# Altium PCB PCB1.PcbDoc (part 2 of 2)
Units mil, origin at the board's own origin, x right, y up, seen from the top; angles counter-clockwise.
Board outline 2835 x 2165.35 mil, 4 copper layers (Top01, GND02, PWR03, Bottom04), stack 23.756 mil thick; 53 components, 129 nets, 681 pads, 268 vias.
Unrouted connection lines stored in the file: 1.
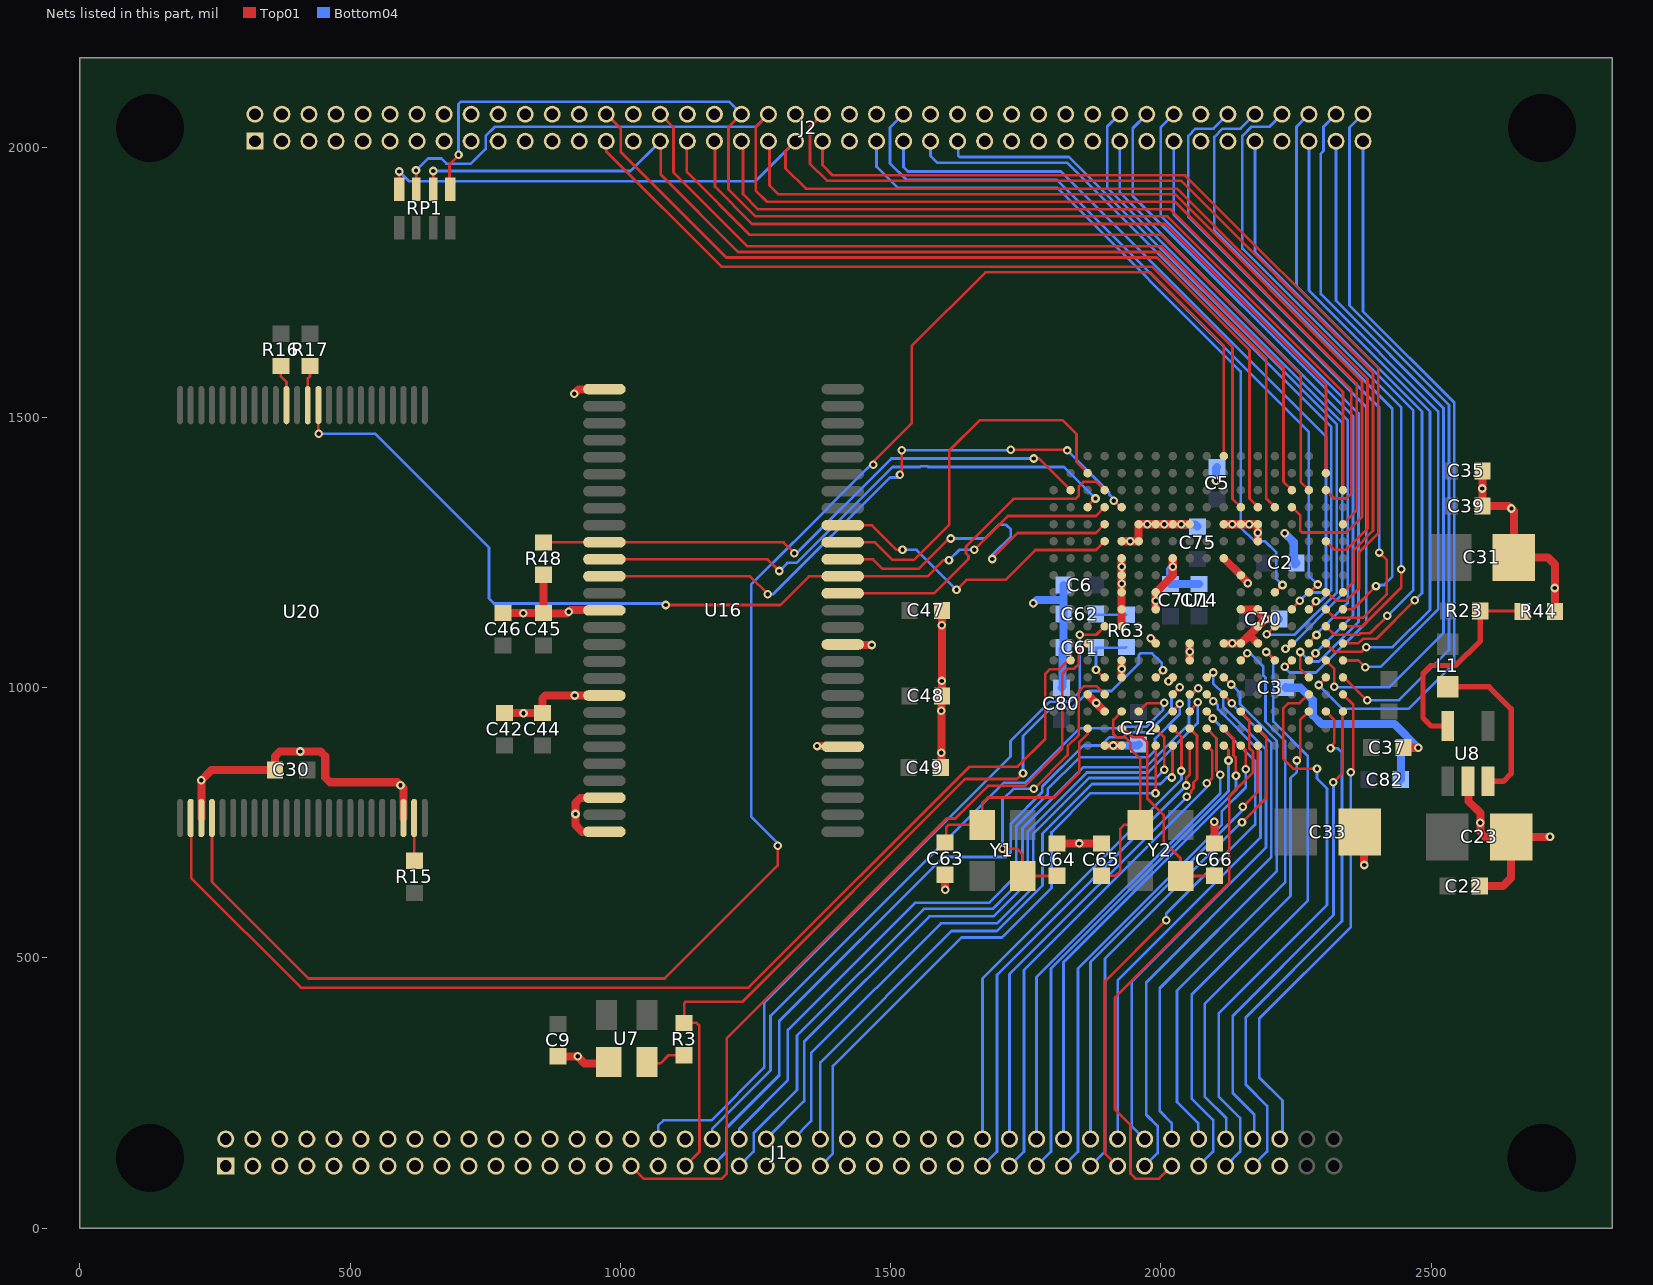
[diagram p4: the nets of this part, all layers, seen from the top]

## Via types
v1: diameter 16, hole 8, Top01 to Bottom04, tented both sides, 268 vias

## Nets (pads, with @x,y where several pads share a name; then routed paths per layer and width w, separated by ;. In a path a pad name is that pad's centre, name@x,y a point inside that pad or via, vN(x,y) a via of type N, cw(c..) or ccw(c..) an arc to the next point about the centre after c; other vN are vias at no path point) (continued)
GND: C2.2 C3.2 C5.2 C6.2 C7.2 C9.2 C22.2 C23.2 C30.2 C31.2 C33.2 C35.2 C37.2 C39.2 C42.2 C44.2 C45.2 C46.2 C47.2 C48.2 C49.2 C61.2 C62.2 C63.2 C64.2 C65.2 C66.2 C70.2 C72.2 C74.2 C75.2 C80.2 C82.2 J1.1 J1.2 J1.3 J1.4 J1.5 J1.6 J1.7 J1.8 J1.9 J1.10 J1.11 J1.12 J1.13 J1.14 J1.15 J1.16 J1.17 J1.18 J1.19 J1.20 J1.21 J1.22 J1.23 J1.24 J1.25 J1.26 J1.27 J1.28 J1.29 J1.30 J1.32 J1.33 J1.36 J1.41 J1.43 J1.47 J1.48 J1.49 J1.50 J1.51 J1.52 J1.53 J1.54 J1.55 J1.56 J1.79 J2.1 J2.2 J2.3 J2.4 J2.5 J2.6 J2.7 J2.8 J2.9 J2.10 J2.11 J2.12 J2.13 J2.14 J2.15 J2.16 J2.17 J2.18 J2.19 J2.20 J2.21 J2.22 J2.23 J2.24 J2.25 J2.26 J2.29 J2.30 J2.34 J2.36 J2.42 J2.45 J2.46 J2.48 J2.52 J2.54 J2.55 J2.56 J2.57 J2.58 J2.59 J2.60 J2.61 J2.62 J2.63 J2.64 J2.67 J2.71 J2.72 J2.73 J2.77 R44.1 R48.2 U1.F5 U1.F6 U1.F10 U1.F11 U1.F12 U1.G5 U1.G8 U1.G10 U1.G12 U1.H5 U1.H7 U1.H12 U1.K5 U1.K12 U1.K13 U1.L5 U1.L7 U1.L14 U1.M5 U1.M9 U1.M10 U1.M12 U1.N5 U1.N6 U1.P6 U1.P7 U1.P8 U1.P9 U1.P10 U1.P11 U1.P13 U1.P14 U1.P18 U1.R16 U1.R18 U1.T15 U7.1 U8.2 U16.6 U16.12 U16.28 U16.41 U16.46 U16.52 U16.54 U20.27 U20.46 | length 4617
  Top01 w15: U20.27@224.83,759 v1(224.83,828.83) 244,848 C30.2@361.08,848 361.08,873.08 370,882 v1(407.61,882) 445.21,882 454,873.21 454,833.79 462.79,825 588,825 v1(593.43,819.57) 598.85,814.15 U20.46@598.85,759 ; C46.2@783,1137.92 v1(820.26,1137.92) C45.2@857.51,1137.92 C45.2@857.76,1137.68 ; C42.2@786,952.92 v1(821,952.92) C44.2@856,952.92 856,980.48 861.04,985.52 v1(915.78,985.52) U16.46@970.53,985.52 ; R48.2@858,1209.08 857.76,1208.83 C45.2@857.76,1137.68 ; C9.2@885,318.08 v1(920.98,318.08) 934,305.06 U7.1@977.47,305.06 ; v1(915,1544) 922.55,1551.55 969.63,1551.55 U16.28@970.53,1552.45 ; U16.54@970.53,733.55 929.24,733.55 917,745.79 v1(917,766.32) 917,786.86 925.79,795.65 969.63,795.65 U16.52@970.53,796.54 ; U16.41@970.53,1143 969.63,1143.9 907.9,1143.9 v1(904.45,1140.45) 901,1137 858.43,1137 C45.2@857.76,1137.68 ; v1(1364,892) 1364.07,891.93 1410.58,891.93 U16.6@1411.47,891.03 ; U16.12@1410.58,1080.9 U16.12@1411.47,1080.01 1412.37,1079.11 v1(1464.89,1079.11) v1@1465,1079 ; C49.2@1592.92,852 1593.92,853 v1(1593.92,879.56) v1(1593.92,957.44) 1593.92,984 C48.2@1594.92,985 v1(1594.92,1012.56) v1(1594.92,1115.44) C47.2@1594.92,1143 ; v1(1601,626.44) C63.2@1601,654 ; C64.2@1808,711.92 v1(1849,711.92) C65.2@1890,711.92 ; U1.T15@1864.48,987.5 U1.R16@1895.98,956.01 v1(1880.23,971.76) ; U1.R18@1895.98,893.02 v1(1911.72,893.02) U1.P18@1927.47,893.02 ; U1.P14@1927.47,1019 v1(1927.47,1034.75) U1.P13@1927.47,1050.5 ; U1.P11@1927.47,1113.49 U1.P10@1927.47,1144.98 U1.P9@1927.47,1176.48 v1(1927.47,1192.23) U1.P8@1927.47,1207.98 v1(1927.47,1223.72) U1.P7@1927.47,1239.47 ; U1.P6@1927.47,1270.97 v1(1943.22,1270.97) U1.N6@1958.97,1270.97 U1.N5@1958.97,1302.46 v1(1974.72,1302.46) U1.M5@1990.46,1302.46 v1(2006.21,1302.46) U1.L5@2021.96,1302.46 v1(2037.71,1302.46) U1.K5@2053.46,1302.46 ; v1@1981,1092 v1(1981,1091.66) 1990.46,1082.19 U1.M12@1990.46,1081.99 ; U1.M10@1990.46,1144.98 v1(1990.46,1160.73) U1.M9@1990.46,1176.48 2021.96,1207.98 v1(2021.96,1223.72) U1.L7@2021.96,1239.47 ; v1(2014,1012) 2014.76,1012 2021.76,1019 U1.L14@2021.96,1019 ; U1.K13@2053.46,1050.5 v1(2053.46,1066.24) U1.K12@2053.46,1081.99 ; C66.2@2099,711.92 v1(2099,752) ; U1.H12@2116.45,1081.99 v1(2132.2,1081.99) U1.G12@2147.95,1081.99 ; U1.H5@2116.45,1302.46 v1(2132.2,1302.46) U1.G5@2147.95,1302.46 v1(2163.69,1302.46) U1.F5@2179.44,1302.46 v1(2179.44,1286.72) U1.F6@2179.44,1270.97 ; U1.H7@2116.65,1239.47 U1.H7@2116.45,1239.47 U1.G8@2147.95,1207.98 2147.95,1207.77 2160.81,1194.91 2160.81,1193.19 v1(2161,1193) ; U1.G10@2147.95,1144.98 U1.F10@2179.44,1144.98 2179.44,1140.33 v1(2192.96,1126.81) ; U1.G12@2147.99,1081.99 2160,1094 ; U1.F12@2179.44,1081.99 2179.24,1081.99 2167.23,1094 2160,1094 ; U1.F11@2179.44,1113.44 2160,1094 ; U1.F11@2179.44,1113.49 2179.64,1113.49 v1(2192.96,1126.81) ; v1@2195.44,1126.81 v1(2192.96,1126.81) ; C33.2@2368.06,733 2376,725.06 v1(2376,672) ; C37.2@2448.92,889 v1(2476.48,889) ; U8.2@2568,826.82 2569,825.82 2569,790 2591,768 v1(2591,750.39) 2591,732.79 2599.79,724 C23.2@2648.11,724 ; C22.2@2589.92,633 2633,633 2648.11,648.11 C23.2@2648.11,724 ; C35.2@2594.84,1401 v1(2594.84,1368.5) C39.2@2594.84,1336 2644,1336 v1(2648.56,1331.44) 2653.11,1326.89 C31.2@2653.11,1241 2716,1241 2728.92,1228.08 v1(2728.92,1184.54) R44.1@2728.92,1141 ; v1(2720,724) C23.2@2648.11,724
  Bottom04 w15: v1(1764,1156) 1770.44,1162.44 1820.08,1162.44 ; C80.2@1816,999.92 1818.04,1001.96 1818.04,1071.96 C61.2@1820.08,1074 C62.2@1820.08,1136 1820.08,1162.44 ; C6.2@1820.08,1190 1820.08,1162.44 ; v1(1911.72,893.02) 1911.92,893.21 1957.05,893.21 C72.2@1959,895.16 ; v1(2021.96,1223.72) 2021.96,1223.45 2017,1218.49 2017,1192.92 C7.2@2018,1191.92 C74.2@2071,1191.92 ; v1(2037.71,1302.46) 2037.9,1302.27 2063.65,1302.27 C75.2@2068,1297.92 ; v1(2102,1383) 2102,1405.92 C5.2@2104,1407.92 ; v1(2192.96,1126.81) 2218.73,1126.81 C70.2@2218.92,1127 ; v1(2229,1286) 2245.75,1269.25 2245.75,1236.17 C2.2@2250.92,1231 C2.2@2247.92,1228 ; C3.2@2230.92,1000.79 C3.2@2230.92,1000 2258.48,1000 2281,977.48 2281,949 2297,933 2432.1,933 v1@2476.29,888.81 ; C82.2@2443.92,830 2443.92,875.92 2456.81,888.81 v1@2476.29,888.81 ; v1(2476.48,889) v1@2476.29,888.81
GPI_00: J1.73 U1.C16 | length 959.3
  Top01 w5: v1(2251.46,865.46) 2257.81,871.81 2257.81,939.89 U1.C16@2273.93,956.01 U1.C16@2273.93,956.93
  Bottom04 w5: J1.73@2070,115 2096.75,141.75 2096.75,200.25 2057,240 2057,432 2240,615 2240,833 2251.46,844.46 v1(2251.46,865.46)
GPI_02: J2.70 U1.C14 | length 1301.6
  Top01 w5: v1(2258,1066) 2258,1034.93 U1.C14@2273.93,1019 U1.C14@2276,1019
  Bottom04 w5: J2.70@2024,2061 2000,2037 2000,1873 2365.5,1507.5 2365.5,1121.45 2292.42,1048.38 2275.62,1048.38 v1(2258,1066)
GPI_03: J2.28 U1.F4 | length 1694.7
  Top01 w5: J2.28@974,2061 1000.75,2034.25 1000.75,1991.25 1196,1796 1993,1796 2164.07,1624.93 2164.07,1350.19 2179.44,1334.82 U1.F4@2179.44,1333.96 U1.F4@2180.96,1333.96
GPI_04: J1.76 U1.E13 | length 1052.5
  Top01 w5: v1@2195,1067 2210.94,1051.06 U1.E13@2210.94,1050.5 U1.E13@2210.5,1050.5
  Bottom04 w5: J1.76@2120,165 2121,166 2121,204 2081,244 2081,415 2272,606 2272,873.14 2208,937.14 2208,1053 v1(2195,1066)
GPI_05: J1.38 U1.N16 | length 1301.8
  Top01 w5: U1.N16@1958.97,956.97 U1.N16@1958.97,956.01 1974.34,971.38 2005.38,971.38 v1(2006,972)
  Bottom04 w5: J1.38@1170,165 1170,184 1278,292 1278,393 1709.44,824.44 1749.36,824.44 1849.68,924.76 1933.14,924.76 1936,927.62 1972.93,927.62 2003.9,958.58 2003.9,969.9 v1(2006,972)
GPI_07: J2.69 U1.D13 | length 1253.1
  Top01 w5: v1@2227,1040 2228.49,1038.51 v1(2229.09,1038.51) 2229.7,1038.51 2241.68,1050.5 U1.D13@2242.43,1050.5 U1.D13@2242.5,1050.5
  Bottom04 w5: J2.69@2024,2011 2024,1875 2380,1519 2380,1121 2287.08,1028.08 2238.04,1028.08 2229.09,1037.02 v1(2229.09,1038.51)
GPI_08: J1.77 U1.B16 | length 967.8
  Top01 w5: U1.B16@2305.43,956.01 2320.8,940.63 2320.8,897.78 2314,890.98 v1(2314,888)
  Bottom04 w5: J1.77@2170,115 2196.75,141.75 2196.75,226.25 2157,266 2157,390 2335,568 2335,880 2327,888 v1(2314,888)
GPI_16: J1.59 U1.J18 | length 937.6
  Top01 w5: v1(2085,823) 2095.08,833.08 2095.08,882.89 U1.J18@2084.95,893.02 U1.J18@2084.95,893.02
  Bottom04 w5: J1.59@1720,115 1746.75,141.75 1746.75,477.66 2085,815.91 v1(2085,823)
GPI_22: J1.74 U1.G13 | length 1051.9
  Top01 w5: U1.G13@2145.5,1050.5 U1.G13@2147.95,1050.5 2147.95,1051.95 v1(2160,1064)
  Bottom04 w5: J1.74@2070,165 2069,166 2069,195 2031,233 2030,233 2030,440 2230,640 2230,901 2193.54,937.46 2193.54,1018.85 2189.3,1023.09 2189.3,1039.7 2165,1064 v1(2160,1064)
GPIO_00: J2.80 U1.A12 | length 1176.4
  Top01 w5: U1.A12@2336.92,1081.99 2365.07,1081.99 2373.58,1090.5 2398.5,1090.5 v1(2470,1162)
  Bottom04 w5: J2.80@2274,2061 2250.75,2037.75 2250.75,1743.39 2483,1511.14 2483,1175 v1(2470,1162)
GPIO_01: J2.78 U1.A11 | length 1187.1
  Top01 w5: U1.A11@2336.92,1114.92 U1.A11@2336.92,1113.49 2372.63,1113.49 2445,1185.86 v1(2445,1219) v1@2445,1220
  Bottom04 w5: J2.78@2224,2061 2200.75,2037.75 2167.87,2037.75 2150.75,2020.63 2150.75,1812.25 2445,1518 v1(2445,1219)
GPO_00: J2.33 U1.C3 | length 1568.5
  Top01 w5: J2.33@1124,2011 1123,2010 1123,1954 1239,1838 2000,1838 2258.56,1579.44 2258.56,1380.83 U1.C3@2273.93,1365.46
GPO_01: J2.39 U1.D4 | length 1759.4
  Top01 w5: J2.39@1274,2011 1276,2009 1276,1929 1292,1913 2026.14,1913 2372.3,1566.85 2372.3,1316.1 2343.2,1287 2260.93,1287 2258,1289.93 2258,1318.39 U1.D4@2242.43,1333.96 U1.D4@2242.43,1335.43
GPO_02: J2.83 U1.B14 | length 1359.7
  Top01 w5: v1(2292,1005) 2292,1005.29 2305.43,1018.71 U1.B14@2305.43,1019 U1.B14@2306,1019
  Bottom04 w5: v1(2292,1005) 2336,961 2458.28,961 2543,1045.72 2543,1527.14 2374,1696.14 J2.83@2374,2011
GPO_03: J2.66 U1.D12 | length 1247
  Top01 w5: v1(2230.67,1072) 2240.67,1081.99 U1.D12@2242.43,1081.99 U1.D12@2243.99,1081.99
  Bottom04 w5: J2.66@1924,2061 1900.75,2037.75 1900.75,1925.53 2335.5,1490.78 2335.5,1172.15 2235.35,1072 v1(2230.67,1072) v1@2226,1072
GPO_05: J2.37 U1.B3 | length 1625.2
  Top01 w5: J2.37@1224,2011 1227,2008 1227,1913 1255,1885 2018,1885 2352.3,1550.7 2352.3,1359.09 2343.29,1350.08 2320.8,1350.08 U1.B3@2305.43,1365.46 U1.B3@2307.46,1365.46
GPO_06: J1.78 U1.A16 | length 894.8
  Top01 w5: v1(2319,825) 2336,842 2336,955.09 U1.A16@2336.92,956.01 U1.A16@2338.01,956.01
  Bottom04 w5: J1.78@2170,165 2173,168 2173,210 2133,250 2133,393 2319.5,579.5 2319.5,824.5 v1(2319,825)
GPO_07: J1.80 U1.A15 | length 924.8
  Top01 w5: U1.A15@2336.92,989.92 U1.A15@2336.92,987.5 2356,968.43 2356,848 v1(2351.5,843.5)
  Bottom04 w5: J1.80@2220,165 2225,170 2225,236 2182,279 2182,387.94 2351.5,557.44 v1(2351.5,843.5)
GPO_08: J2.68 U1.C13 | length 1223.7
  Top01 w5: U1.C13@2273.93,1051.93 U1.C13@2273.93,1050.5 2274.5,1050.5 v1@2286,1062
  Bottom04 w5: J2.68@1974,2061 1948,2035 1948,1910 2355.5,1502.5 2355.5,1133.5 2286,1064 v1(2286,1063.88)
GPO_09: J2.65 U1.C12 | length 1133.3
  Top01 w5: U1.C12@2273.99,1081.99 U1.C12@2273.93,1081.99 2273.93,1083.46 v1(2288,1097.53)
  Bottom04 w5: J2.65@1924,2011 1924,1916.43 2345.5,1494.93 2345.5,1156.5 2288,1099 v1(2288,1097.53)
GPO_10: J2.53 U1.E11 | length 1420.6
  Top01 w5: v1(2196,1099) 2210.49,1113.49 U1.E11@2210.94,1113.49
  Bottom04 w5: J2.53@1624,2011 1625,2010 1625,1984.93 1627.93,1982 1830.14,1982 2325.5,1486.64 2325.5,1176.3 2247.2,1098 v1@2202,1098
GPO_12: J2.79 U1.B12 | length 1192.2
  Top01 w5: U1.B12@2305.43,1083.43 U1.B12@2305.43,1081.99 2320.8,1066.62 2371.62,1066.62 v1(2380,1075)
  Bottom04 w5: J2.79@2274,2011 2274,1735 2498,1511 2498,1144.08 2428.92,1075 v1(2380,1075)
GPO_13: J2.81 U1.B13 | length 1289.2
  Top01 w5: U1.B13@2307.5,1050.5 U1.B13@2305.43,1050.5 2321,1034.92 v1(2321,1002)
  Bottom04 w5: J2.81@2324,2011 2324,1716 2523,1517 2523,1101.08 2422.92,1001 v1@2324.64,1001
GPO_14: J2.32 U1.D3 | length 1628.3
  Top01 w5: J2.32@1074,2061 1098.5,2036.5 1098.5,1953.5 1235.5,1816.5 2001.5,1816.5 2227,1591 2227,1380.89 U1.D3@2242.43,1365.46
GPO_15: J2.84 U1.A14 | length 1330.8
  Top01 w5: U1.A14@2336.92,1019.92 U1.A14@2336.92,1019 2338.46,1019 2380.46,977 v1(2382,977)
  Bottom04 w5: J2.84@2374,2061 2349,2036 2349,1707 2533,1523 2533,1069.44 2440.56,977 v1(2382,977)
GPO_16: J2.49 U1.D10 | length 1398.8
  Top01 w5: U1.D10@2244.98,1144.98 U1.D10@2242.43,1144.98 2242.43,1146.43 v1(2257,1161)
  Bottom04 w5: J2.49@1524,2011 1524,1963 1532,1955 1815,1955 2305.5,1464.5 2305.5,1184.58 2296.92,1176 2272,1176 v1(2257,1161)
GPO_20: J2.35 U1.B2 | length 1530.2
  Top01 w5: J2.35@1174,2011 1175,2010 1175,1927 1244,1858 2008,1858 2305.43,1560.57 U1.B2@2305.43,1396.95
LDQM0: U1.R3 U16.15 | length 606.7
  Top01 w5: U16.15@1411.47,1174.5 1580.5,1174.5 1644.12,1238.12 1644.12,1243.96 1639.5,1248.58 1639.5,1261.42 1727.41,1349.34 1842,1349.34 1848.36,1355.69 1848.36,1372.36 1856.83,1380.83 1880.6,1380.83 U1.R3@1895.98,1365.46 U1.R3@1895.54,1365.46
LDQM1: U1.P4 U16.39 | length 1153.8
  Top01 w5: U16.39@970.53,1205.99 1240.01,1205.99 v1(1273,1173) ; v1(1517.25,1394.25) 1520.5,1397.5 v1(1520.5,1439.5) ; v1(1722,1440) 1826,1440 v1(1827,1439) ; v1(1913,1346) 1925.04,1333.96 U1.P4@1927.47,1333.96
  Bottom04 w5: v1(1273,1173) 1282.92,1173 1498.92,1389 1512,1389 v1(1517.25,1394.25) ; v1(1520.5,1439.5) 1721.5,1439.5 v1(1722,1440) ; v1(1827,1439) 1904.5,1361.5 1904.5,1357.48 1913,1348.98 v1(1913,1346)
LnSDCAS: U1.R5 U16.17 | length 662.4
  Top01 w5: U16.17@1411.47,1237.49 1467.51,1237.49 1485,1220 1552,1220 1608,1276 v1(1611,1276) ; v1(1688,1238) 1688,1239.34 1735,1286.34 1879.85,1286.34 U1.R5@1895.98,1302.46 U1.R5@1893.54,1302.46
  Bottom04 w5: v1(1611,1276) 1675.08,1276 1700.58,1301.5 1713.42,1301.5 1722.5,1292.42 1722.5,1279.58 1688,1245.08 v1(1688,1238)
LnSDCS0: U1.R6 U16.19 | length 572.2
  Top01 w5: U16.19@1411.47,1300.48 1465.52,1300.48 1511,1255 v1(1522,1255) ; v1(1622,1181) 1640.46,1199.46 1712.46,1199.46 1767.85,1254.85 1879.85,1254.85 U1.R6@1895.98,1270.97 U1.R6@1895.03,1270.97
  Bottom04 w5: v1(1522,1255) 1548,1255 v1(1622,1181)
LnSDRAS: U1.T2 U16.18 | length 725
  Top01 w5: U16.18@1411.47,1268.98 1471.02,1268.98 1503.5,1236.5 1543.5,1236.5 1608.41,1301.41 1608.41,1438.41 1665,1495 1818,1495 1844,1469 1844,1417.43 1853.24,1408.2 U1.T2@1864.48,1396.95 U1.T2@1864.05,1396.95
MISO0: J2.51 U1.C10 | length 1335.7
  Top01 w5: U1.C10@2273.93,1144.98 2273.93,1145.96 2287,1159.03 v1(2287,1160)
  Bottom04 w5: J2.51@1574,2011 1574,1984 1587,1971 1827,1971 2315.5,1482.5 2315.5,1180.44 2295.06,1160 v1(2287,1160)
MISO1: J2.76 U1.A10 | length 1158.5
  Top01 w5: U1.A10@2336.92,1144.98 2354.98,1144.98 v1(2398,1188)
  Bottom04 w5: J2.76@2174,2061 2147.25,2034.25 2114.37,2034.25 2099,2018.88 2099,1846 2428,1517 2428,1205 2413.1,1190.1 2400.1,1190.1 v1(2398,1188)
MOSI0: J2.43 U1.B9 | length 1728.4
  Top01 w5: J2.43@1374,2011 1374,1967 1393,1948 2045,1948 2402.3,1590.7 2402.3,1286.3 2367,1251 2367,1184.82 2343.29,1161.11 2324,1161.11 ; U1.B9@2305.43,1178.43 U1.B9@2305.43,1176.48 2308.21,1176.48 2317.69,1167 2318.14,1167 2324,1161.14
MOSI1: J2.44 U1.A9 | length 1732.2
  Top01 w5: J2.44@1374,2061 1350.75,2037.75 1350.75,1969.25 1382,1938 2037,1938 2392.3,1582.7 2392.3,1290.44 2357,1255.14 2357,1196.56 U1.A9@2336.92,1176.48
nCS0: U1.U13 U20.26 | length 2146.2
  Top01 w5: U20.26@205.15,759 206,758.15 206,648 409,445 1237.49,445 1646.49,854 1735.08,854 1786.11,905.03 1786.11,1025.37 1795.12,1034.37 1812.47,1034.37 1828.6,1050.5 U1.U13@1832.98,1050.5 U1.U13@1832.98,1048.02
nCS1: J1.34 U1.R11 | length 1382
  Top01 w5: v1(1850,1098) 1880.49,1098 U1.R11@1895.98,1113.49
  Bottom04 w5: J1.34@1070,165 1070,190 1079.69,199.69 1168.31,199.69 1266,297.38 1266,416.58 1722,872.58 1722,901.54 1794.6,974.13 1831.53,974.13 1850,992.61 v1(1850,1098)
nCS2: J1.31 U1.T12 | length 1505.2
  Top01 w5: J1.31@1020,115 1043.25,91.75 1187.75,91.75 1196.75,100.75 1196.75,350.91 1603.84,758 1619.57,758 1643.09,781.53 1679.94,818.37 1748.37,818.37 1817.61,887.61 ; 1817.61,888.61 1817.61,1025.37 1827.36,1035.12 1839.35,1035.12 1848.36,1044.13 1848.36,1068.36 1861.99,1081.99 U1.T12@1864.48,1081.99 U1.T12@1864.48,1081.52
NetC61_1: C61.1 R63.1 U1.R14 | length 119.3
  Top01 w5: v1(1880,1033) 1894,1019 U1.R14@1895.98,1019
  Bottom04 w5: v1(1880,1033) 1880,1073.92 C61.1@1879.92,1074 1934.92,1074 R63.1@1936,1075.08
NetC62_1: C62.1 R63.2 | length 56.5
  Bottom04 w5: C62.1@1879.92,1136 1881,1134.92 R63.2@1936,1134.92
NetC63_1: C63.1 U1.T17 Y1.1 | length 428.4
  Top01 w5: C63.1@1601,713.84 1603,715.84 1603,742 1607.24,746.24 Y1.1@1669.6,746.24 1669.6,786.6 1680,797 1803,797 1849.11,843.11 1849.11,899.38 1864.48,914.76 U1.T17@1864.48,924.51
NetC64_1: C64.1 U1.R15 Y1.2 | length 586.2
  Top01 w5: 1712.41,694.57 1707,699.98 v1(1707,702.2) 1733.35,702.2 1744.4,691.15 Y1.2@1744.4,651.76 1807.68,651.76 C64.1@1808,652.08 ; v1(1765,813) 1827.61,875.61 1827.61,892.03 1848.36,912.78 1848.36,993.12 1858.11,1002.88 1880.6,1002.88 U1.R15@1895.98,987.5 U1.R15@1894.5,987.5
  Bottom04 w5: v1(1707,702.2) 1707,793 1727,813 v1(1765,813)
NetC65_1: C65.1 U1.P16 Y2.1 | length 405.1
  Top01 w5: C65.1@1890,652.08 1916.08,652.08 1925,661 1925,739.32 1931.93,746.24 Y2.1@1961.6,746.24 1961.6,868.64 1943.59,886.65 1943.59,898.64 1933.71,908.52 1917.48,908.52 1912.1,913.9 1912.1,940.63 U1.P16@1927.47,956.01 U1.P16@1924.99,956.01
NetC66_1: C66.1 U1.P17 Y2.2 | length 394.3
  Top01 w5: U1.P17@1926.49,924.51 U1.P17@1927.47,924.51 1929.53,922.46 1933.92,922.46 1947.98,908.39 1965.34,908.39 1975.09,898.64 1975.09,794.54 2005.28,764.35 2005.28,715.58 2036.4,684.46 Y2.2@2036.4,651.76 2098.68,651.76 C66.1@2099,652.08
NetL1_1: L1.1 U8.3 | length 302.3
  Top01 w10: L1.1@2531,1001.63 2607.37,1001.63 2648,961 2648,841 2633.82,826.82 U8.3@2605.4,826.82
NetR3_1: R3.1 U7.2 | length 75.9
  Top01 w5: U7.2@1048.34,305.06 1074.06,305.06 1089.08,320.08 R3.1@1118,320.08
NetR15_1: R15.1 U20.47 | length 79.3
  Top01 w5: U20.47@618.54,759 618.54,680.39 R15.1@619,679.92
NetR16_1: R16.1 U20.14 | length 76.6
  Top01 w5: R16.1@372,1595.08 372,1576 377,1571 ; 377.03,1571 382.31,1565.71 U20.14@382.31,1522.78
NetR17_1: R17.1 U20.12 | length 74.1
  Top01 w5: U20.12@421.68,1522.78 421.68,1571.68 426,1576 R17.1@426,1595.08
NetR23_1: R23.1 R44.2 U8.5 | length 398.9
  Top01 w5: R23.1@2590.92,1142 2668.08,1142 R44.2@2669.08,1141
  Top01 w10: U8.5@2530.6,929.18 2499.82,929.18 2485,944 2485,1026.5 2499.5,1041 2545.14,1041 2590.92,1086.78 R23.1@2590.92,1142
nOE: U1.H1 U20.28 | length 3329.6
  Top01 w5: U20.28@244.52,759 244.52,640.48 423,462 1082,462 1291,671 v1(1291,707.53) ; v1(1467.82,1412.5) 1467.82,1417.82 1539,1489 1539,1632.14 1675.36,1768.5 1980.36,1768.5 2116.45,1632.41 2116.45,1430.51 U1.H1@2116.45,1428.45 U1.H1@2114.39,1430.51
  Bottom04 w5: v1(1291,707.53) 1291,713 1242,762 1242,1190.92 1319.94,1268.86 1320,1268.86 1447.14,1396 1463.64,1412.5 v1(1467.82,1412.5)
nRESET: J1.35 R3.2 U1.M14 | length 1685.1
  Top01 w5: J1.35@1120,115 1146,141 1146,247.84 ; 1146.75,141.75 1146,247.84 ; v1(1745,842) 1734,831 1637.64,831 1225.64,419 1120.93,419 1118,416.07 R3.2@1118,379.92 1141.08,379.92 1146,375 1146,247.84 ; U1.M14@1990.46,1019 1991,1019 v1(2004,1032)
  Bottom04 w5: v1(1745,842) 1745,910.39 1797.15,962.54 1835.54,962.54 1867,994 1908.64,994 1959.25,1044.6 1959.25,1060.57 1962.18,1063.5 1983.64,1063.5 2001.9,1045.24 2001.9,1034.1 v1(2004,1032)
nSYSRESET: J2.27 U1.G4 | length 1632.2
  Top01 w5: J2.27@974,2011 974,1992 1187,1779 1984,1779 2132.57,1630.43 2132.57,1349.34 U1.G4@2147.95,1333.96 U1.G4@2147.95,1335.95
nTRST: J1.64 U1.H17 | length 901
  Top01 w5: U1.H17@2116.51,924.51 U1.H17@2116.45,924.51 2134.57,906.39 2134.57,874.98 2138.5,871.05 2138.5,837.5 v1(2139,837)
  Bottom04 w5: J1.64@1820,165 1820,492.09 2139,811.09 v1(2139,837)
nWE: U1.R4 U16.16 U20.11 | length 1768.9
  Top01 w5: U20.11@441.37,1522.78 441.37,1470.63 v1(442,1470) ; v1(1084,1153) 1296.02,1153 1349.01,1205.99 U16.16@1411.47,1205.99 1567.99,1205.99 1598,1236 v1(1608,1236) ; v1(1655,1255) 1655,1255.92 1716.92,1317.84 1879.85,1317.84 U1.R4@1895.98,1333.96
  Bottom04 w5: v1(442,1470) 546,1470 757,1259 757,1165 766.05,1155.95 1078.08,1155.95 1081.02,1153 v1(1084,1153) ; v1(1608,1236) 1627,1255 v1(1655,1255)
P0.2: J1.44 U1.M17 | length 1183.3
  Top01 w5: U1.M17@1990.46,924.51 2006,908.98 v1(2006,848)
  Bottom04 w5: J1.44@1320,165 1353,198 1353,324 1593,564 1696.49,564 1764.07,631.58 1764.07,729.93 1867.14,833 1991,833 v1(2006,848)
P0.3: J1.45 U1.M18 | length 1149.6
  Top01 w5: v1(1990,805) 1990.46,805.46 U1.M18@1990.46,893.02 U1.M18@1990.46,893.46
  Bottom04 w5: J1.45@1370,115 1393.25,138.25 1393.25,300.25 1631,538 1706,538 1797.57,629.57 1797.57,732.43 1870.14,805 v1(1990,805)
P0.4: J1.37 U1.L15 | length 1387.1
  Top01 w5: U1.L15@2021.96,987.5 2021.96,987.96 v1(2035,1001)
  Bottom04 w5: J1.37@1170,115 1196,141 1196,185 1294,283 1294,383 1597.7,686.7 1713.42,686.7 1722.5,695.78 1722.5,748.58 1780.5,806.58 1780.5,816.78 1856.98,893.26 1890.05,893.26 1905.3,908.52 1931.04,908.52 1940.15,917.62 1977.08,917.62 2019.5,960.04 2019.5,985.5 v1(2035,1001)
P0.5: J1.40 U1.L16 | length 1317.8
  Top01 w5: U1.L16@2023.01,956.01 U1.L16@2021.96,956.01 2021.96,956.96 v1(2035,970)
  Bottom04 w5: J1.40@1220,165 1220,184 1310,274 1310,367 1545,602 1681.92,602 1732.5,652.58 1732.5,744.44 1790.5,802.44 1790.5,812.64 1849.11,871.25 1976.4,871.25 1989,883.84 1989,905.52 2035,951.52 v1(2035,970)
P0.6: J1.46 U1.L18 | length 1128.1
  Top01 w5: v1(2020,834) 2021.5,835.5 2021.5,892.55 U1.L18@2021.96,893.02 U1.L18@2021.96,894.96
  Bottom04 w5: J1.46@1370,165 1370,307 1613,550 1696.64,550 1781,634.36 1781,730 1873,822 1999,822 2011,834 v1(2020,834)
P0.7: J1.58 U1.L17 | length 919
  Top01 w5: U1.L17@2021.96,924.96 U1.L17@2021.96,924.51 2038,908.47 v1(2038,846)
  Bottom04 w5: J1.58@1670,165 1670,462.08 2038,830.08 v1(2038,846)
RTCK: J1.61 U1.H18 | length 930
  Top01 w5: U1.H18@2116.45,894.45 U1.H18@2116.45,893.02 2125,884.46 v1(2125,865.46)
  Bottom04 w5: J1.61@1770,115 1796.75,141.75 1796.75,480.16 2125,808.41 v1(2125,865.46)
SCK0: J2.50 U1.C9 | length 1393.4
  Top01 w5: U1.C9@2273.93,1176.93 U1.C9@2273.93,1176.48 2275.48,1176.48 v1(2290,1191)
  Bottom04 w5: J2.50@1524,2061 1499,2036 1499,1970 1529,1940 1807.06,1940 2273.38,1473.68 2273.38,1207.62 v1(2290,1191)
SCK1: J2.74 U1.B10 | length 1229.5
  Top01 w5: U1.B10@2305.43,1147.89 U1.B10@2305.43,1144.98 2320.8,1129.61 2374.61,1129.61 2418,1173 2418,1236 v1(2404,1250)
  Bottom04 w5: J2.74@2124,2061 2097.25,2034.25 2064.37,2034.25 2050.75,2020.63 2050.75,1871.25 2404,1518 v1(2404,1250)
SCL1: J2.40 RP1.3 U1.A5 | length 2436
  Top01 w5: v1(622,1957) 622.5,1956.5 RP1.3@622.5,1922 ; J2.40@1274,2061 1250.75,2037.75 1250.75,1919.25 1271,1899 2026,1899 2362.3,1562.7 2362.3,1327.84 U1.A5@2336.92,1302.46 U1.A5@2336.92,1304.92
  Bottom04 w5: v1(622,1957) 644,1979 668.93,1979 678.43,1969.5 723.5,1969.5 750.75,1996.75 750.75,2020.63 767.87,2037.75 1250.75,2037.75 J2.40@1274,2061
SCL2: J2.38 RP1.1 U1.A3 | length 2323.4
  Top01 w5: RP1.1@685.5,1922 684,1923.5 684,1968 700.75,1984.75 v1(700.75,1986) ; J2.38@1224,2061 1200,2037 1200,1922 1250,1872 2012,1872 2336.92,1547.08 U1.A3@2336.92,1365.46 U1.A3@2337.46,1365.46
  Bottom04 w5: v1(700.75,1986) 700.75,2079.75 705.25,2084.25 1200.75,2084.25 J2.38@1224,2061
SDA1: J2.41 RP1.4 U1.B6 | length 2476.3
  Top01 w5: RP1.4@591.01,1922 v1(591,1955) ; J2.41@1324,2011 1305.75,1992.75 1305.75,1960.6 1343.11,1923.25 2030.04,1923.25 2382.3,1570.99 2382.3,1294.6 2342.7,1255 2321.39,1255 U1.B6@2305.43,1270.97
  Bottom04 w5: v1(591,1955) 609,1937 1250,1937 J2.41@1324,2011
SDA2: J2.31 RP1.2 U1.E4 | length 2081.2
  Top01 w5: RP1.2@654,1922 v1(654,1956) ; J2.31@1074,2011 1075,2010 1075,1949 1218,1806 1997.14,1806 2195,1608.14 2195,1349.9 U1.E4@2210.94,1333.96
  Bottom04 w5: v1(654,1956) 1019,1956 J2.31@1074,2011
SDR_CKE0: R48.1 U1.U3 U16.37 | length 1082.6
  Top01 w5: R48.1@858,1268.92 858.06,1268.98 U16.37@970.53,1268.98 1302.02,1268.98 v1(1322,1249) ; v1(1765,1424) 1774.44,1424 1831.71,1366.74 U1.U3@1832.98,1365.46 U1.U3@1832.98,1368.02
  Bottom04 w5: v1(1322,1249) 1326.38,1249 1501.38,1424 v1(1765,1424)
SDR_CLK: U1.T4 U16.38 | length 1046.7
  Top01 w5: U16.38@970.53,1237.49 1272.51,1237.49 v1(1294,1216) ; U1.T4@1866.54,1336.02 U1.T4@1864.48,1333.96 1864.48,1336.48 v1@1878,1350
  Bottom04 w5: v1(1294,1216) 1309,1231 1325.92,1231 1503.42,1408.5 1554.58,1408.5 1555.58,1409.5 1568.42,1409.5 1569.42,1408.5 1820.5,1408.5 v1(1879,1350)
SERVICES_N: J1.75 U1.C15 | length 1075.5
  Top01 w5: U1.C15@2274.5,987.5 U1.C15@2273.93,987.5 2272.98,987.5 2256.86,971.38 2236.07,971.38 2226.31,961.63 2226.31,868.68 2245.04,849.96 v1(2288.97,849.97)
  Bottom04 w5: J1.75@2120,115 2146.75,141.75 2146.75,204.25 2107,244 2107,397.5 2307.5,598 2307.5,813.5 2288.97,832.03 v1(2288.97,849.97)
SSEL0: J2.47 U1.E9 | length 1335.7
  Top01 w5: U1.E9@2210.94,1176.48 2211.48,1176.48 v1(2225,1190)
  Bottom04 w5: J2.47@1474,2011 1474,1964 1513,1925 1807.92,1925 2147.7,1585.22 2147.7,1296.54 2173.02,1271.22 2192.18,1271.22 2213.54,1249.85 2213.54,1201.46 v1(2225,1190)
SSEL1: J2.75 U1.B11 | length 1153.7
  Top01 w5: U1.B11@2305.49,1113.49 U1.B11@2305.43,1113.49 2320.8,1098.11 2367.05,1098.11 2369.44,1100.5 2386.5,1100.5 v1(2419,1133)
  Bottom04 w5: J2.75@2174,2011 2174,1806 2467,1513 2467,1181 v1(2419,1133)
TCK: J1.72 U1.H14 | length 991
  Top01 w5: U1.H14@2116.45,1019.55 U1.H14@2116.45,1019 2117,1019 v1(2130,1006)
  Bottom04 w5: J1.72@2020,165 2020,195 1998,217 1998,444 2214.5,660.5 2214.5,901.64 2146.5,969.64 2146.5,990.5 v1@2133,1004
TDI: J1.67 U1.J16 | length 1002.8
  Top01 w5: J1.67@1920,115 1896.75,138.25 1896.75,456.75 v1(2010,570) ; U1.J16@2084.95,956.01 2084.95,955.09 2096,944.04 v1(2096,943.12)
  Bottom04 w5: v1(2010,570) 2010,582.49 2174.5,746.99 2174.5,864.5 2096,943 v1(2096,943.12)
TDO: J1.68 U1.J15 | length 974.3
  Top01 w5: U1.J15@2084.95,987.5 2084.95,987.05 v1(2097,975)
  Bottom04 w5: J1.68@1920,165 1920,458.08 2184.5,722.58 2184.5,881.44 2105.5,960.44 2105.5,967.5 v1@2097,976
TMS: J1.63 U1.G18 | length 923.4
  Top01 w5: U1.G18@2150.02,893.02 U1.G18@2147.95,893.02 2157,883.96 v1(2157,849)
  Bottom04 w5: J1.63@1820,115 1846.75,141.75 1846.75,480.66 2112.5,746.41 2112.5,771.12 2157,815.62 v1(2157,849)
U1_RX: J1.39 U1.K15 | length 1398.2
  Top01 w5: U1.K15@2053.46,987.5 2055.48,987.5 2066.98,999 v1(2069,999)
  Bottom04 w5: J1.39@1220,115 1246.75,141.75 1246.75,175.75 1327,256 1327,356.5 1561.5,591 1689,591 1716.33,618.33 1744,646 1744,740 1857,853 1972.3,853 2052,932.7 2052,982 v1(2069,999)
U1_TX: J1.42 U1.K16 | length 1297.4
  Top01 w5: U1.K16@2053.46,956.01 2053.46,957.23 2068,971.78 v1(2068,973)
  Bottom04 w5: J1.42@1270,165 1340,235 1340,345 1572,577 1690.49,577 1754,640.51 1754,734 1863,843 1976.44,843 2068,934.56 v1(2068,973)
U2_RX: J1.57 U1.K18 | length 938.4
  Top01 w5: v1(2047,819) 2047,833 2053.46,839.46 U1.K18@2053.46,893.02 U1.K18@2055.02,893.02
  Bottom04 w5: J1.57@1670,115 1696.75,141.75 1696.75,468.75 v1(2047,819)
U2_TX: J1.60 U1.K17 | length 910.7
  Top01 w5: v1(2048,798) 2056,806 2056,808.91 2060.5,813.41 2060.5,824.59 2066.83,830.92 2066.83,911.14 U1.K17@2053.46,924.51 U1.K17@2053.46,926.46
  Bottom04 w5: J1.60@1720,165 1720,470 v1(2048,798)
U3_RX: J1.70 U1.J14 | length 1018.1
  Bottom04 w5: J1.70@1970,165 1946,189 1946,456 2194.5,704.5 2194.5,885.58 2115.5,964.58 2115.5,989.43 2096.86,1008.06 2096.86,1023.79 2098.97,1025.9 v1(2096.86,1028)
U3_TX: J1.62 U1.J17 | length 912.3
  Top01 w5: U1.J17@2086.51,924.51 U1.J17@2084.95,924.51 2103.08,906.39 2103.08,845.92 v1(2110,839)
  Bottom04 w5: J1.62@1770,165 1770,464.72 2110,804.72 v1(2110,839)
U4_TX: J2.82 U1.A13 | length 1243.1
  Top01 w5: U1.A13@2336.92,1050.5 2365.5,1050.5 v1(2378,1038)
  Bottom04 w5: J2.82@2324,2061 2300.75,2037.75 2300.75,1992.75 2296,1988 2296,1728 2513,1511 2513,1144.94 2407.03,1038.97 2378.97,1038.97 v1(2378,1038)
U5_RX: J1.66 U1.F18 | length 856.8
  Top01 w5: v1(2151.5,779.5) 2179,807 2179,892.57 U1.F18@2179.44,893.02 U1.F18@2180.02,893.02
  Bottom04 w5: J1.66@1870,165 1870,492.59 2151.5,774.09 v1(2151.5,779.5)
U5_TX: J1.69 U1.H15 | length 1025.5
  Top01 w5: U1.H15@2116.45,989.45 U1.H15@2116.45,987.5 2116.45,986.53 2131,971.98 v1(2131,971)
  Bottom04 w5: J1.69@1970,115 1994,139 1994,189 1973,210 1973,455 2204.5,686.5 2204.5,897.5 v1(2131,971)
U6_RX: J1.65 U1.F17 | length 952.9
  Top01 w5: v1(2150,751) 2195,796 2195,908.95 U1.F17@2179.44,924.51 U1.F17@2181.51,924.51
  Bottom04 w5: J1.65@1870,115 1896.75,141.75 1896.75,498.75 v1@2149.5,751.5
U6_TX: J1.71 U1.G16 | length 1071.7
  Top01 w5: J1.71@2020,115 1996.75,91.75 1953.25,91.75 1944,101 1944,191 1915,220 1915,426.76 2126.56,638.32 2126.56,799.47 2170.5,843.41 2170.5,881.77 2163.32,888.96 2163.32,940.63 U1.G16@2147.95,956.01 U1.G16@2148.01,956.01
pads on no net: U1.A4 U1.A6 U1.A7 U1.A8 U1.B4 U1.B5 U1.B7 U1.B8 U1.B15 U1.B17 U1.C1 U1.C2 U1.C4 U1.C5 U1.C6 U1.C7 U1.C8 U1.C11 U1.C17 U1.C18 U1.D1 U1.D2 U1.D5 U1.D6 U1.D7 U1.D8 U1.D9 U1.D11 U1.D14 U1.D15 U1.D16 U1.D17 U1.D18 U1.E1 U1.E2 U1.E3 U1.E5 U1.E6 U1.E7 U1.E8 U1.E10 U1.E12 U1.E14 U1.E15 U1.E16 U1.E17 U1.E18 U1.F1 U1.F2 U1.F3 U1.F14 U1.F15 U1.F16 U1.G1 U1.G2 U1.G3 U1.G14 U1.G15 U1.G17 U1.H2 U1.H3 U1.H4 U1.H16 U1.J1 U1.J2 U1.J3 U1.J4 U1.L2 U1.M15 U1.M16 U1.N17 U1.N18 U1.P5 U1.P12 U1.R9 U1.R10 U1.R12 U1.R13 U1.T1 U1.T3 U1.T9 U1.T10 U1.T11 U1.T13 U1.T14 U1.U2 U1.U9 U1.U10 U1.U11 U1.U12 U1.U14 U1.U15 U1.U16 U1.U17 U1.V8 U1.V9 U1.V10 U1.V11 U1.V12 U1.V13 U1.V14 U1.V15 U1.V16 U7.3 U16.40 U20.10 U20.13 U20.15 Y1.3 Y1.4 Y2.3 Y2.4

## Polygon pours and split planes (outlines as drawn)
no net on Top01 (solid, pour order 12): 0,2165.35
3V3 on Top01 "Top01-3V3" (solid, pour order 10): 572,1865 706,1865 706,1796 708,1794 572,1794
3V3 on Top01 "Top01-3V3 1" (solid, pour order 0): 2507,861 2453,807 2453,669 2515,607 2519,611 2551,611 2551,661 2546,666 2554,674 2574,674 2574,762 2553,783 2542,783 2537,788 2537,861 2508,861 2507,860
GND on GND02 (split plane): 2814.9,20.1 20.1,20.1 20.1,2145.26 2814.9,2145.26
1V2 on PWR03 (split plane): 2623.9,1483.89 2623.9,1095.11 2610.4,1081.61 2610.4,1081.6 2592.89,1064.1 2476.72,1064.1 2477.1,1066 2476.71,1067.95 2475.6,1069.6 2473.95,1070.71 2472,1071.1 2062,1071.1 2060.05,1070.71 2058.4,1069.6 2057.29,1067.95 2056.9,1066 2056.9,1023 2056.9,1018.11 2052.89,1014.1 1974.23,1014.1 1968.66,1019.67 1968.66,1055.29 1968.66,1103.45 2020.23,1155.02 2021.33,1156.67 2021.72,1158.62 2021.72,1179.47 2094.15,1251.9 2142.89,1251.9 2156.9,1237.89 2156.9,1162.32 2157.29,1160.37 2158.4,1158.72 2162.72,1154.4 2164.37,1153.29 2166.32,1152.9 2289,1152.9 2290.95,1153.29 2292.6,1154.4 2516.6,1378.4 2517.71,1380.05 2518.1,1382 2518.1,1435 2518.1,1472.89 2531.11,1485.9 2621.89,1485.9
1V2_PLL on PWR03 (split plane): 1968.51,1005.4 1970.17,1004.29 1972.12,1003.9 1980.48,1003.9 2014.99,969.4 2015.32,969.17 2015.55,968.84 2017.2,967.73 2019.15,967.34 2146.5,967.34 2148.45,967.73 2148.71,967.9 2356.37,967.9 2396.9,927.37 2396.9,905 2396.9,772.11 2319.4,694.6 2307.77,682.98 2202.23,682.98 2191.1,694.11 2191.1,745 2190.71,746.95 2189.6,748.6 2122.6,815.6 2120.95,816.71 2119,817.1 1871.11,817.1 1828.1,860.11 1828.1,995.89 1841.07,1008.86 1959.95,1008.86 1961.91,1009.24 1963.56,1010.35
3V3 on PWR03 (split plane): 2814.9,20.1 20.1,20.1 20.1,2145.26 2814.9,2145.26

## Other copper
PWR03 (plane layer: these items are gaps in the copper):
  lines w10: 1959.95,1013.95 1838.95,1013.95 1823,998 1823,858 1869,812 2119,812 2186,745 2186,692 2200.12,677.88 2309.88,677.88 2323,691 2402,770 2402,905 2402,929.48 2358.48,973 2169,973 2131.93,973 ; 1982.59,1009 2018.59,973 2143.52,973 ; 1984.06,1009 2074,1009 2076,1011 ; 1996,1009 1972.12,1009 1963.56,1017.56 1963.56,1055.29 1963.56,1105.56 2016.62,1158.62 2016.62,1181.58 2092.04,1257 2145,1257 2162,1240 2162,1162.32 2166.32,1158 2289,1158 2513,1382 2513,1435 2513,1475 2529,1491 2624,1491 2629,1486 2629,1093 2614,1078 2595,1059 2465,1059 ; 2019.15,972.44 2146.5,972.44 ; 2054,1008 2062,1016 2062,1023 2062,1066 2472,1066 2461.29,1055.29 ; 2603,1435 2614,1424

## Silkscreen, mask and mechanical layers (free items; w line width, h text height)
Top Overlay:
  text "Mg_D" at 2530,297 h60
Mechanical 1:
  lines w10: -220,60 -200,0 ; -220,2105.35 -200,2165.35 ; -210,0 -190,0 ; -210,2165.35 -190,2165.35 ; -200,691.8 -200,0 ; -200,1473.56 -200,2165.35 ; -180,60 -200,0 ; -180,2105.35 -200,2165.35 ; 2834.65,0 0,0 ; 2835,0 2835,2165.35 0,2165.35 ; -200,0 0,0 ; -200,2165.35 0,2165.35 ; 0,0 0,2165.35
  text "2165.354 (mil)" at -164.01,701.8 h60 r90

## Dimensions
0,0 to 2834.65,0 on Mechanical 1

## Text inside footprints (layer, text, board x,y; h text height)
U1: Top Overlay "A" at 2324.88,1472.98 h40; Top Overlay "1" at 2374.88,1417.98 h40